# Altium PCB ArduinoMainBoard.PcbDoc
Units mil, origin at the board's own origin, x right, y up, seen from the top; angles counter-clockwise.
Board outline 4480 x 3980 mil, 2 copper layers (Top Layer, Bottom Layer); 122 components, 77 nets, 432 pads, 53 vias.
Unrouted connection lines stored in the file: 1.
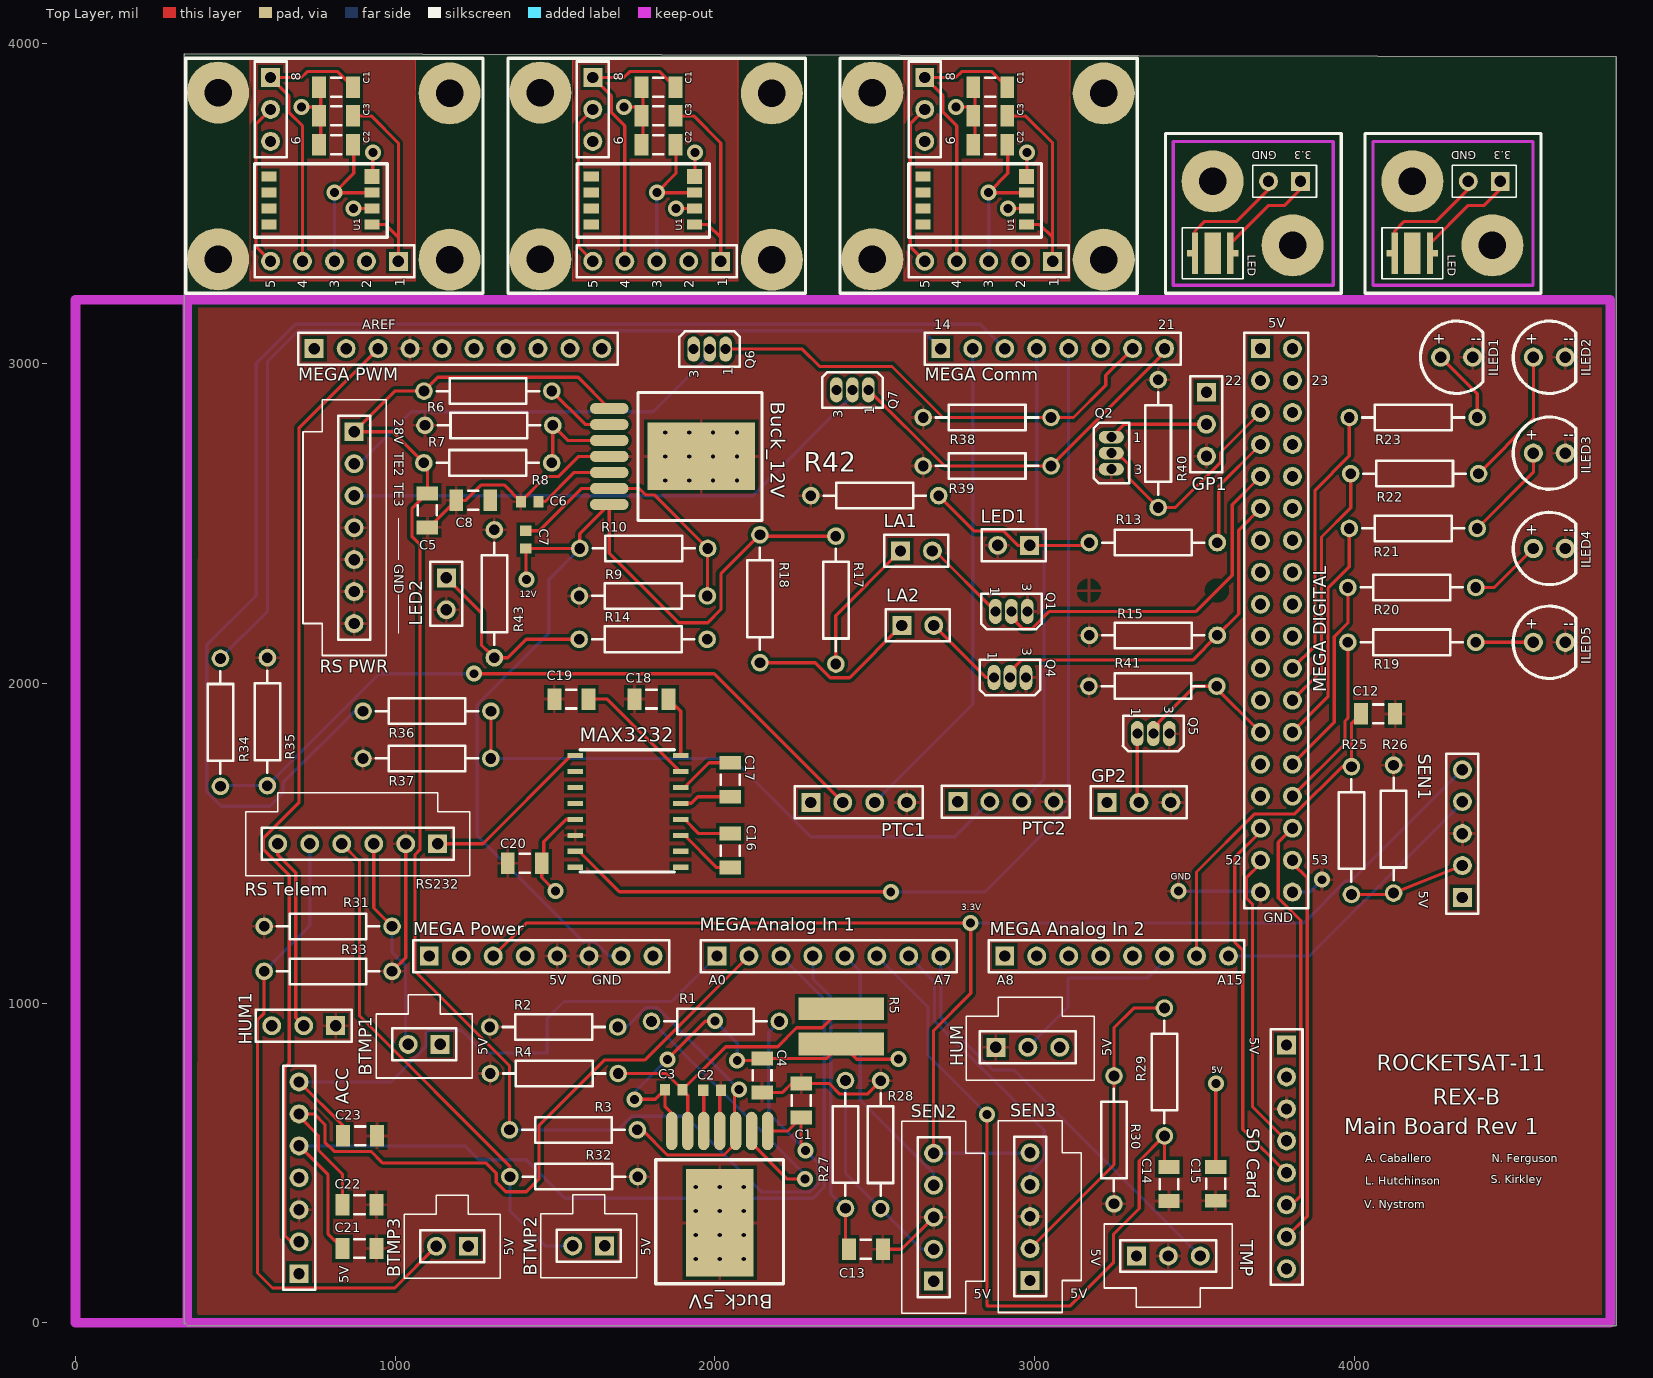
[diagram p0: Top Layer view]
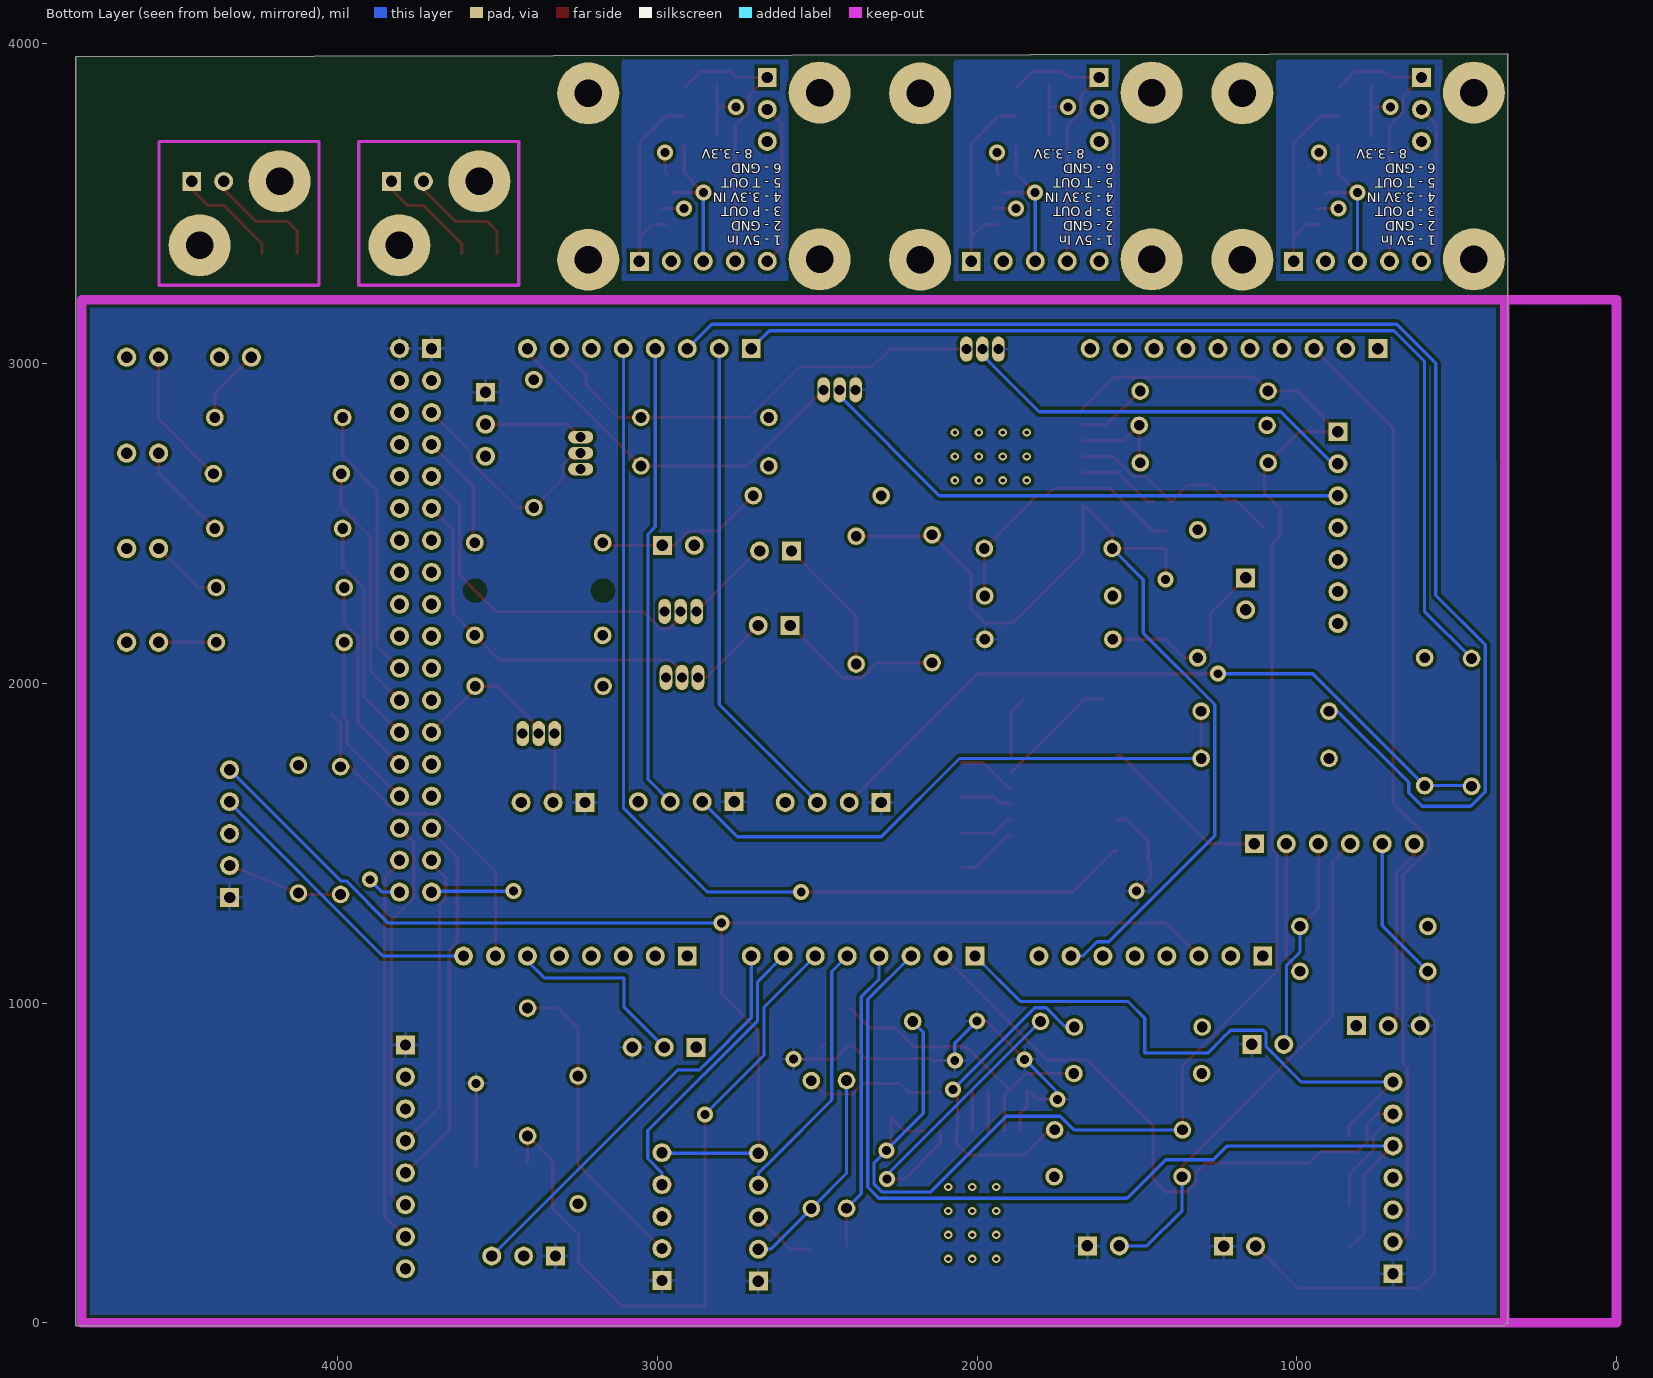
[diagram p1: Bottom Layer view, seen from below]

## Layer stack, top to bottom
Top Solder: solder mask 0.4, Solder Resist, Dk 3.5
Top Layer: signal copper 1.4
Dielectric1: dielectric 12.6, FR-4, Dk 4.8
Bottom Layer: signal copper 1.4
Bottom Solder: solder mask 0.4, Solder Resist, Dk 3.5

## Board outline
340,3970 340,0 350,-10 4820,-10 4820,3960

## Design rules (kind name [scope] priority, off if disabled: settings)
Clearance [All] p1: gap=10
ComponentClearance [All] p1: gap=5 collisioncheckmode=3 verticalgap=10 showdistances=FALSE
PolygonConnect [All] p1: connectstyle=Relief reliefconductorwidth=10 reliefentries=4 polygonreliefangle="90 Angle" airgapwidth=10
RoutingVias [All] p1: holewidth=28 width=50 viastyle="Through Hole" minholewidth=28 minwidth=50 maxholewidth=28 maxwidth=50
SilkToSilkClearance [All] p1: silktosilkclearance=5
SilkToSolderMaskClearance SilkscreenOverComponentPads [IsPad] p1: minsilkscreentomaskgap=10 clearancetoexposedcopper=TRUE
SolderMaskExpansion [All] p1: expansion=4
Width [All] p1: maxlimit=10 minlimit=10 preferedwidth=10
27 further rules are at their usual default settings.

## Classes and differential pairs
component class Telemetry_AnalogSensors_PTC08_Shifter: BTMP1 BTMP2 BTMP3 C16 C17 C18 C19 C20 HUM1 MAX3232 "MEGA Comm" PTC1 PTC2 R31 R32 R33 R34 R35 R36 R37 "RS Telem"
component class Analog_Input: ACC C12 C13 C14 C15 C21 C22 C23 HUM "MEGA Analog In 1" "MEGA Analog In 2" "MEGA PWM" R25 R26 R27 R28 R29 R30 SEN1 SEN2 SEN3 TMP
component class GoPro_Actuator_LED: GP1 GP2 LA1 LA2 LED1 LED2 Q1 Q2 Q4 Q5 R13 R14 R15 R17 R18 R40 R41 R42 R43
component class Power_TimerEvents: Buck_5V Buck_12V C1 C2 C3 C4 C5 C6 C7 C8 Q6 Q7 R1 R2 R3 R4 R5 R6 R7 R8 R9 R10 R38 R39 "RS PWR"
component class ArduinoPWR-DIG_SDCard: ILED1 ILED2 ILED3 ILED4 ILED5 "MEGA DIGITAL" "MEGA Power" R19 R20 R21 R22 R23 "SD Card"

## Components (designator, comment, footprint, x,y, rotation, side; value= is the part's Value field where it differs from the comment)
5 "Pressure" HDR1X5 3056.23,3320 r180 top (schematic designator P)
5 "Pressure" HDR1X5 2018.15,3320 r180 top (schematic designator P)
5 "Pressure" HDR1X5 1010,3320 r180 top (schematic designator P)
ACC "Accelerometer" HDR1X7 699.27,153.11 r90 top
BTMP1 "Boom Temp" HDR1X2 1140.49,870.64 r180 top
BTMP2 "Boom Temp" HDR1X2 1654.92,240.34 r180 top
BTMP3 "Boom Temp" HDR1X2 1228.86,239.22 r180 top
Buck_5V "LMZ14203HTZ" LMZ1420 2164.94,599.77 r180 top
Buck_12V "LMZ14201H" LMZ1420 1669.49,2859.75 r270 top
C1 "Cap Semi" C1206 2861.23,3865 r180 top
C1 "Cap Semi" C1206 1823.15,3865 r180 top
C1 "Cap Semi" C1206 815,3865 r180 top
C1 "Cap Semi" C1206 2269.58,695.27 r90 top
C2 "Cap Semi" C1206 2861.23,3685 r0 top
C2 "Cap Semi" C1206 1823.15,3685 r0 top
C2 "Cap Semi" C1206 815,3685 r0 top
C2 "Cap Semi" 1608[0603] 1990.99,726.97 r0 top
C3 "Cap Semi" C1206 2861.23,3775 r180 top
C3 "Cap Semi" C1206 1823.15,3775 r180 top
C3 "Cap Semi" C1206 815,3775 r180 top
C3 "Cap Semi" 1608[0603] 1871.06,728.49 r180 top
C4 "Cap Semi" C1206 2147.42,773.56 r270 top
C5 "Cap Semi" C1206 1100.75,2540.97 r270 top
C6 "Cap Semi" 1608[0603] 1420.37,2568.37 r180 top
C7 "Cap Semi" 1608[0603] 1408.62,2449.65 r270 top
C8 "Cap Semi" C1206 1244.25,2572.28 r180 top
C12 "Cap Semi" C1206 4074.37,1904.28 r180 top
C13 "Cap Semi" C1206 2472.08,229.77 r180 top
C14 "Cap Semi" C1206 3420.21,433.66 r90 top
C15 "Cap Semi" C1206 3566.03,434.5 r270 top
C16 "Cap Semi" C1206 2047.95,1476.81 r270 top
C17 "Cap Semi" C1206 2047.95,1698.35 r270 top
C18 "Cap Semi" C1206 1801.6,1950.82 r0 top
C19 "Cap Semi" C1206 1550.96,1950.82 r0 top
C20 "Cap Semi" C1206 1405.12,1436.86 r0 top
C21 "Cap" C1206 888.21,232.12 r180 top
C22 "Cap" C1206 888.21,368.74 r180 top
C23 "Cap" C1206 890,584.28 r180 top
GP1 "GoPro 1" HDR1X3 3537.5,2910.44 r270 top
GP2 "GoPro 2" HDR1X3 3226.24,1627.43 r0 top
HUM "Humidity" HDR1X3 2878.77,861.32 r0 top
HUM1 "Humidity" HDR1X3 813.76,929.25 r180 top
ILED1 "LED" LED#1 4270,3020 r0 top
ILED2 "LED" LED#1 4560,3020 r0 top
ILED3 "LED" LED#1 4560,2720 r0 top
ILED4 "LED" LED#1 4560,2421.79 r0 top
ILED5 "LED" LED#1 4560,2128.39 r0 top
LA1 "Actuator (F)" HDR1X2 2580.26,2414.03 r0 top
LA2 "Actuator (R)" HDR1X2 2584.65,2181.13 r0 top
LED "LED" LED#2 4181.6,3345 r90 top (schematic designator P10)
LED "LED" LED#2 3556.73,3345 r90 top (schematic designator P10)
LED1 "Front LED" HDR1X2 2984.55,2431.47 r180 top
LED2 "Rear LED" HDR1X2 1160,2330 r270 top
MAX3232 "Component_1" rs232 1662.98,1774.62 r0 top
"MEGA Analog In 1" "MEGA Analog In 1" HDR1X8 2006.42,1147.02 r0 top
"MEGA Analog In 2" "MEGA Analog Input 2" HDR1X8 2906.42,1147.02 r0 top
"MEGA Comm" "MEGA Communication" HDR1X8 2706.42,3047.02 r0 top (schematic designator M5)
"MEGA DIGITAL" "MEGA Digital" HDR2X18 3706.42,3047.02 r270 top (schematic designator M4)
"MEGA Power" "MEGA_Power" HDR1X8 1106.42,1147.02 r0 top (schematic designator M1)
"MEGA PWM" "MEGA PWN Output" HDR1X10 746.42,3047.02 r0 top (schematic designator M6)
P9 "Header" HDR1X2 4456.6,3570 r180 top
P9 "Header" HDR1X2 3831.73,3570 r180 top
PTC1 "PTC08 (R)" HDR1X4 2300,1627.43 r0 top
PTC2 "PTC08 (F)" HDR1X4 2760,1630 r0 top
Q1 "MOSFET-N" E3 2927.42,2224.93 r90 top
Q2 "MOSFET-N" E3 3240,2720 r0 top
Q4 "MOSFET-N" E3 2923.02,2018.39 r90 top
Q5 "MOSFET-N" E3 3371.26,1842.75 r90 top
Q6 "MOSFET-N" E3 1983.5,3045.39 r270 top
Q7 "MOSFET-N" E3 2430,2917.95 r270 top
R1 "Res2" AXIAL-0.4 2001.67,942.52 r0 top
R2 "Res2" AXIAL-0.4 1496.11,925.03 r0 top
R3 "Res2" AXIAL-0.4 1557.46,603.33 r180 top
R4 "Res2" AXIAL-0.4 1497.48,779.62 r0 top
R5 "smd_res1" smd_res1 2395.32,982.31 r270 top
R6 "Res2" AXIAL-0.4 1289.88,2914.14 r180 top
R7 "Res2" AXIAL-0.4 1292.9,2806.79 r0 top
R8 "Res2" AXIAL-0.4 1289.56,2689.81 r180 top
R9 "smd_res1" AXIAL-0.4 1776.08,2273.41 r180 top
R10 "smd_res1" AXIAL-0.4 1777.47,2421.79 r180 top
R13 "Res2" AXIAL-0.4 3371.26,2440 r0 top
R14 "Res2" AXIAL-0.4 1775.56,2137.8 r0 top
R15 "Res2" AXIAL-0.4 3371.26,2150 r0 top
R17 "Res2" AXIAL-0.4 2378.11,2260.23 r270 top
R18 "Res2" AXIAL-0.4 2140.81,2264.62 r270 top
R19 "Res2" AXIAL-0.4 4179.83,2128.39 r180 top
R20 "Res2" AXIAL-0.4 4179.83,2299.78 r180 top
R21 "Res2" AXIAL-0.4 4184.23,2484.34 r180 top
R22 "Res2" AXIAL-0.4 4188.62,2655.72 r180 top
R23 "Res2" AXIAL-0.4 4184.23,2831.5 r180 top
R25 "Res2" AXIAL-0.4 3990.87,1539.54 r90 top
R26 "Res2" AXIAL-0.4 4122.71,1543.93 r270 top
R27 "Res2" AXIAL-0.4 2408.36,557.69 r90 top
R28 "Res2" AXIAL-0.4 2518.3,557.08 r90 top
R29 "Res2" AXIAL-0.4 3405.99,784.28 r270 top
R30 "Res2" AXIAL-0.4 3248.23,571.96 r90 top
R31 "Res2" AXIAL-0.4 790,1240 r0 top
R32 "Res2" AXIAL-0.4 1558.74,456.94 r180 top
R33 "Res2" AXIAL-0.4 790,1099.06 r180 top
R34 "Res2" AXIAL-0.4 453.35,1877.91 r90 top
R35 "Res2" AXIAL-0.4 600,1880 r90 top
R36 "Res2" AXIAL-0.4 1099.33,1913.06 r180 top
R37 "Res2" AXIAL-0.4 1099.2,1764.99 r180 top
R38 "Res2" AXIAL-0.4 2851.48,2831.5 r0 top
R39 "Res2" AXIAL-0.4 2851.48,2680 r0 top
R40 "Res2" AXIAL-0.4 3386.57,2750 r270 top
R41 "Res2" AXIAL-0.4 3370,1991.09 r0 top
R42 "Res2" AXIAL-0.4 2500,2587.02 r0 top
R43 "Res2" AXIAL-0.4 1310,2280 r90 top
"RS PWR" "RS Power" HDR1X7 871.42,2787.02 r270 top (schematic designator RS1)
"RS Telem" "RockSat Telemetry" HDR1X6 1132.74,1498.09 r180 top
"SD Card" "SD_Card" HDR1X8 3787.9,868.74 r270 top (schematic designator SD)
SEN1 "Temp/Press" HDR1X5 4338.03,1330 r90 top
SEN2 "Temp/Press" HDR1X5 2684.01,130.26 r90 top
SEN3 "Temp/Press" HDR1X5 2985.79,132.12 r90 top
T "Temperature" HDR1X3 2656.23,3895 r270 top
T "Temperature" HDR1X3 1618.15,3895 r270 top
T "Temperature" HDR1X3 610,3895 r270 top
TMP "Amb Temp" HDR1X3 3318.38,208.77 r0 top
U1 "Pressure" KP-234 2651.23,3435 r0 top
U1 "Pressure" KP-234 1613.15,3435 r0 top
U1 "Pressure" KP-234 605,3435 r0 top

## Footprints (in the part's own frame and the unit in brackets; to place one, negate y for a bottom-side part, rotate by r counter-clockwise, add the part's x,y. Pads: shape width x height; smd on the part's side, far side on the other; paste and mask are expansions set on the pad)
1608[0603] [mm] "Chip Capacitor, Body 1.6x0.8mm, IPC High Density"
  rect 0.8x0.9 smd: 1(-0.7,0) 2(0.7,0)
  body extent -0.87,-0.48 0.87,0.48, height 1.3
AXIAL-0.4 [mm] "Axial Device, Thru-Hole; 2 Leads; 0.4 in Pin Spacing"
  round 1.4 hole 0.85: 1(-5.08,0) 2(5.08,0)
  silkscreen extent -4.06,-1.02 4.06,1.02
C1206 [mm] "Chip Capacitor, Body 3.2x1.6mm, IPC High Density"
  rect 1.1x1.7 smd: 1(-1.35,0) 2(1.35,0)
  silkscreen extent -0.4,-0.75 0.4,0.75, body extent -1.7,-0.9 1.7,0.9, height 1.3
E3 [mm] "TO, Flat Index; 3 In-Line, Axial Leads; Body Dia. 4.6mm; Lead Dia. 0.5 mm (max)"
  oval 2x1 hole 0.8: 1(0,1.27) 2(0,0) 3(0,-1.27)
  silkscreen extent -1.41,-2.41 1.41,2.41
HDR1X2 [mm] "Connector; Header; 2 Position"
  rect 1.5x1.5 hole 0.9: 1(0,0)
  round 1.5 hole 0.9: 2(2.54,0)
  silkscreen extent -1.27,-1.27 3.81,1.27
HDR1X3 [mm] "Connector; Header; 3 Position"
  rect 1.5x1.5 hole 0.9: 1(0,0)
  round 1.5 hole 0.9: 2(2.54,0) 3(5.08,0)
  silkscreen extent -1.27,-1.27 6.35,1.27
HDR1X4 [mm] "Connector; Header; 4 Position"
  rect 1.5x1.5 hole 0.9: 1(0,0)
  round 1.5 hole 0.9: 2(2.54,0) 3(5.08,0) 4(7.62,0)
  silkscreen extent -1.27,-1.27 8.89,1.27
HDR1X5 [mm] "Connector; Header; 5 Position"
  rect 1.5x1.5 hole 0.9: 1(0,0)
  round 1.5 hole 0.9: 2(2.54,0) 3(5.08,0) 4(7.62,0) 5(10.16,0)
  silkscreen extent -1.27,-1.27 11.43,1.27
HDR1X6 [mm] "Connector; Header; 6 Position"
  rect 1.5x1.5 hole 0.9: 1(0,0)
  round 1.5 hole 0.9: 2(2.54,0) 3(5.08,0) 4(7.62,0) 5(10.16,0) 6(12.7,0)
  silkscreen extent -1.27,-1.27 13.97,1.27
HDR1X7 [mm] "Connector; Header; 7 Position"
  rect 1.5x1.5 hole 0.9: 1(0,0)
  round 1.5 hole 0.9: 2(2.54,0) 3(5.08,0) 4(7.62,0) 5(10.16,0) 6(12.7,0) 7(15.24,0)
  silkscreen extent -1.27,-1.27 16.51,1.27
HDR1X8 [mm] "Connector; Header; 8 Position"
  rect 1.5x1.5 hole 0.9: 1(0,0)
  round 1.5 hole 0.9: 2(2.54,0) 3(5.08,0) 4(7.62,0) 5(10.16,0) 6(12.7,0) 7(15.24,0) 8(17.78,0)
  silkscreen extent -1.27,-1.27 19.05,1.27
HDR1X10 [mm] "Connector; Header; 10 Position"
  rect 1.5x1.5 hole 0.9: 1(0,0)
  round 1.5 hole 0.9: 2(2.54,0) 3(5.08,0) 4(7.62,0) 5(10.16,0) 6(12.7,0) 7(15.24,0) 8(17.78,0) 9(20.32,0) 10(22.86,0)
  silkscreen extent -1.27,-1.27 24.13,1.27
HDR2X18 [mm] "Connector; Header; 18x2 Position"
  rect 1.5x1.5 hole 0.9: 1(0,0)
  round 1.5 hole 0.9: 2(0,2.54) 3(2.54,0) 4(2.54,2.54) 5(5.08,0) 6(5.08,2.54) 7(7.62,0) 8(7.62,2.54) 9(10.16,0) 10(10.16,2.54) 11(12.7,0) 12(12.7,2.54) 13(15.24,0) 14(15.24,2.54) 15(17.78,0) 16(17.78,2.54) 17(20.32,0) 18(20.32,2.54) 19(22.86,0) 20(22.86,2.54) 21(25.4,0) 22(25.4,2.54) 23(27.94,0) 24(27.94,2.54) 25(30.48,0) 26(30.48,2.54) 27(33.02,0) 28(33.02,2.54) 29(35.56,0) 30(35.56,2.54) 31(38.1,0) 32(38.1,2.54) 33(40.64,0) 34(40.64,2.54) 35(43.18,0) 36(43.18,2.54)
  silkscreen extent -1.27,-1.27 44.45,3.81
KP-234 [mm]
  rect 1.2x0.8 smd: 1(0,3.81) 2(0,2.54) 3(0,1.27) 4(0,0) 5(8.2,0) 6(8.2,1.27) 7(8.2,2.54)
  rect 1.2x1.2 smd: 8(8.2,3.81)
  silkscreen extent -1.14,-1.02 9.4,4.83
LED#1 [mil]
  round 60 hole 35.43: 0(0,0) 1(100,0)
  silkscreen extent -63,-113 133,113, body extent -68,-120 168,116, height 398
LED#2 [mil]
  rect 19.68x15.75 smd: 1(0,72.83) 2(0,-72.83)
  rect 129.92x19.68 smd: 1(0,55.12) 2(0,-55.12)
  rect 129.92x51.18 smd: ""(0,0)
  silkscreen extent -80,-95 80,95
LMZ1420 [mm]
  oval 0.89x3.06 smd mask+0.1: 1(0,0) 2(1.27,0) 3(2.54,0) 4(3.81,0) 5(5.08,0) 6(6.35,0) 7(7.62,0)
  rect 5.35x8.54 smd mask+0.1: 8(3.81,7.305)
  silkscreen extent -1.27,2.29 8.89,12.14
rs232 [mil]
  rect 47.5x16 smd: 1(-100,0) 2(-100,-50) 3(-100,-100) 4(-100,-150) 5(-100,-200) 6(-100,-250) 7(-100,-300) 8(-100,-350) 9(230,-350) 10(230,-300) 11(230,-250) 12(230,-200) 13(230,-150) 14(230,-100) 15(230,-50) 16(230,0)
  silkscreen extent -85,-365 210,18
smd_res1 [mm]
  rect 1.8x6.8 smd mask+0.102: 1(0,0) 2(2.8,0)

## Part data
5 5 5: library part "Header 5H", "Header, 5-Pin, Right Angle"
ACC "RS PWR": library part "Header 7", "Header, 7-Pin"
BTMP1 BTMP2 BTMP3 LA1 LA2 LED1 LED2 P9 P9: library part "Header 2", "Header, 2-Pin"
Buck_5V Buck_12V LED LED "MEGA Comm" "MEGA DIGITAL" "MEGA Power" "RS Telem" "SD Card" U1 U1 U1: library part Component_1
C1 C1 C1 C1 C2 C2 C2 C2 C3 C3 C3 C3 C4 C5 C6 C7 C8 C12 C13 C14 C15 C16 C17 C18 C19 C20: "Capacitor (Semiconductor SIM Model)"
C21 C22 C23: "Capacitor"
GP1 GP2 HUM HUM1 T T T TMP: library part "Header 3", "Header, 3-Pin"
"MEGA Analog In 1" "MEGA Analog In 2": library part "Header 8", "Header, 8-Pin"
"MEGA PWM": library part "Header 10", "Header, 10-Pin"
PTC1 PTC2: library part "Header 4", "Header, 4-Pin"
Q1 Q2 Q4 Q5 Q6 Q7: "N-Channel MOSFET"
R1 R2 R3 R4 R6 R7 R8 R13 R14 R15 R17 R18 R19 R20 R21 R22 R23 R25 R26 R27 R28 R29 R30 R31 R32 R33 R34 R35 R36 R37 R38 R39 R40 R41 R42 R43: "Resistor"
SEN1 SEN2 SEN3: library part "Header 5", "Header, 5-Pin"

## Free pads (board coordinates)
  round 194 hole 86: 0(446,3326) 0(446,3847.94) 0(1170,3325) 0(1170,3845) 0(1454.15,3326) 0(1454.15,3847.94) 0(2178.15,3325) 0(2178.15,3845) 0(2492.23,3326) 0(2492.23,3847.94) 0(3216.23,3325) 0(3216.23,3845)
  round 194 hole 86 unplated: 0(3556.73,3570) 0(3806.73,3370) 0(4181.6,3570) 0(4431.6,3370)

## Via types
v1: diameter 50, hole 28, Top Layer to Bottom Layer, 29 vias
v2: diameter 25.98, hole 12.99, Top Layer to Bottom Layer, 24 vias

## Nets (pads, with @x,y where several pads share a name; then routed paths per layer and width w, separated by ;. In a path a pad name is that pad's centre, name@x,y a point inside that pad or via, vN(x,y) a via of type N, cw(c..) or ccw(c..) an arc to the next point about the centre after c; other vN are vias at no path point)
3.3V: "MEGA Power.3" SEN1.5 SEN2.5 SEN3.5 | length 4355.5
  Top Layer w10: 1306.42,1147.02 1409.4,1250 v1(2800,1250) 2800,1030 2684.01,914.01 SEN2.5
  Bottom Layer w10: SEN2.5 SEN3.5@2983.93,530.26 ; v1(2800,1250) 3841.15,1250 3973.25,1382.1 3990.13,1382.1 SEN1.5 ; SEN1.5@4324.85,1733.7 4334.34,1733.7 SEN1.5@4338.03,1737.39
5V: "MEGA DIGITAL.1" "MEGA DIGITAL.2" "SD Card.1" ACC.1 BTMP1.1 BTMP2.1 BTMP3.1 Buck_5V.7 C3.2@1843.5,728.49 C4.1 C15.1 C20.2 GP1.1 GP2.1 HUM1.3 HUM.3 MAX3232.5 PTC1.1 PTC2.1 Q6.3 Q7.3 R5.2 R14.2 SEN1.1 SEN2.1 SEN3.1 TMP.1 | length 1877
  Top Layer w10: v1(1500.86,1349.94) 1458.27,1392.53 C20.2 1464.54,1443.13 1464.54,1504.55 1534.61,1574.62 MAX3232.5@1560.02,1574.62 ; v1(1748.82,698.89) 1813.9,698.89 1843.5,728.49 1843.5,677.04 1864.94,655.6 Buck_5V.7 ; v1(1851.23,824.01) 1970.34,943.13 v1(2000.77,943.13) ; v1(2069.79,820.34) C4.1@2141.05,820.34 ; C4.1 2349.95,826.71 R5.2 2443.13,824.26 v1(2574.25,824.26) ; R5.2@2475.58,872.08 R5.2@2488.37,859.29 ; C15.1@3566.82,488.45 v1(3566.82,748.99)
  Bottom Layer w10: v1(1748.82,698.89) 1748.82,721.61 v1(1851.23,824.01) ; v1(2000.77,943.13) 2069.79,874.12 v1(2069.79,820.34)
12V: "MEGA Power.7" Buck_12V.7 C7.2 C8.1 R10.2 R17.1 R18.1 | length 3210.5
  Top Layer w10: v1@1408.62,2325.7 C7.2 1577.17,2422.1 1577.17,2467.43 Buck_12V.7 1669.49,2406.51 1886.26,2189.74 1977.52,2189.74 2018.63,2230.85 2018.63,2342.44 R18.1 2145.21,2460.23 R17.1
  Bottom Layer w10: R10.2 1480,2324.32 1480,2157.15 1256.64,1933.79 1256.64,1523.36 1588.45,1191.55 1624.86,1191.55 1669.39,1147.02 1706.42,1147.02
  other v1: 1410,2324.32
A0: "MEGA Analog In 1.1" ACC.7 C23.2 | length 1847.2
  Top Layer w10: ACC.7 836.85,615.53 C23.2
  Bottom Layer w10: ACC.7 985.94,753.11 1095.96,863.14 1095.96,906.38 1104.75,915.16 1206.63,915.16 1226.1,895.69 ; 1226.1,897.86 1226.1,895.69 ; 2006.42,1147.02 1864.48,1005.08 1715.97,1005.08 1715.73,1004.84 1527.8,1004.84 1475.4,952.45 1475.4,843.25 1278.54,843.25 1226.1,895.69
A1: "MEGA Analog In 1.2" ACC.6 C22.2 | length 2300.5
  Top Layer w10: C22.2 835.06,464.94 760,540 760,584.8 699.27,645.53 ACC.6 746.89,653.11 780,620 780,564.8 808.98,535.81 924.19,535.81 960,500 1283.59,500 1316.18,467.42 1316.18,439.32 1345.49,410 1410,410 1450,450 1450,617.25 1654.92,822.18 1781.58,822.18 2106.42,1147.02
A2: "MEGA Analog In 1.3" ACC.5 C21.2 | length 2881.4
  Top Layer w10: ACC.5 790,462.38 790,277.19 C21.2
  Bottom Layer w10: ACC.5 1217.99,553.11 1261.11,510 1410,510 1530.69,389.31 2307.06,389.31 2342.21,424.45 2342.21,1011.23 2206.42,1147.02
A13: "MEGA Analog In 2.6" HUM.2 | length 609
  Bottom Layer w10: HUM.2 3104.05,986.59 3104.05,1078.75 3353.57,1078.75 3406.42,1131.6 3406.42,1147.02
AREF: "MEGA PWM.3" ACC.2 | length 3014.4
  Top Layer w10: ACC.2 674.43,253.11 654.75,272.8 654.75,797.64 668.74,811.63 668.74,1399.12 588.21,1479.65 588.21,1516.53 699.27,1627.6 699.27,2799.88 946.42,3047.02
GND: "MEGA DIGITAL.35" "MEGA DIGITAL.36" "MEGA Power.5" "MEGA Power.6" "MEGA PWM.4" "RS PWR.4" "RS PWR.5" "RS PWR.6" "RS PWR.7" "RS Telem.2" "SD Card.3" ACC.3 Buck_5V.4 Buck_5V.8 Buck_12V.4 Buck_12V.8 C1.2@2269.58,748.42 C2.2@2018.55,726.97 C4.2 C5.2 C6.2 C8.2 C12.1 C13.1 C14.1 C15.2 C18.1 C19.1 C20.1 C21.1 C22.1 C23.1 GP1.3 GP2.3 HUM1.1 HUM.1 ILED1.1 ILED2.1 ILED3.1 ILED4.1 ILED5.1 LED1.2 LED2.2 MAX3232.6 PTC1.4 PTC2.4 Q1.3 Q2.3 Q4.3 Q5.3 R2.1 R4.1 R7.1 R9.2 R15.1 R26.1 R28.2 R30.1 R31.1 R32.1 R33.1 R35.2 R37.2 R38.1 R39.1 R40.1 R41.1 R42.1 R43.2 SEN1.3 SEN2.3 SEN3.3 TMP.2 | length 2224.4
  Top Layer w10: R33.1 1032.74,1141.8 1032.74,1498.09 ; C5.2 1106.64,2487.82 C8.2 1221.07,2572.28 1269.53,2620.75 1340.43,2620.75 C6.2 1471.69,2647.25 1511.54,2647.25 1574.03,2709.75 Buck_12V.4 ; Buck_5V.4 C2.2@2014.94,723.36 ; C4.2 2211.66,720.41 2239.67,748.42 2269.58,748.42 2357.43,748.42 2390.73,715.13 2476.35,715.13 R28.2 ; C13.1 2583.52,229.77 SEN2.3
  Bottom Layer w10: v1(3450,1349.94) 3703.5,1349.94 3706.42,1347.02 ; 3806.42,1347.02 3860.06,1347.02 v1(3898.7,1385.66)
  other v2: 1939.94,199.77 2014.94,199.77 2089.94,199.77 1939.94,274.77 2014.94,274.77 2089.94,274.77 1939.94,349.77 2014.94,349.77 2089.94,349.77 1939.94,424.77 2014.94,424.77 2089.94,424.77 1844.49,2634.75 1919.49,2634.75 1994.49,2634.75 2069.49,2634.75 1844.49,2709.75 1919.49,2709.75 1994.49,2709.75 2069.49,2709.75 1844.49,2784.75 1919.49,2784.75 1994.49,2784.75 2069.49,2784.75
GPRO_TRIG1: "MEGA DIGITAL.5" Q2.2 R40.2 | length 703.4
  Top Layer w10: Q2.2 3255.31,2704.68 3274.05,2704.68 3294.37,2684.37 3294.37,2642.2 R40.2 3440.04,2550 3582.03,2691.99 3582.03,2722.02 3581.42,2722.02 3706.42,2847.02
GPRO_TRIG2: "MEGA DIGITAL.25" Q5.2 R41.2 | length 467.3
  Top Layer w10: Q5.2 3386.57,1858.07 3386.57,1876.81 3500.86,1991.09 3562.35,1991.09 3706.42,1847.02
LA_TRIG1: "MEGA DIGITAL.9" Q1.2 | length 1139.1
  Top Layer w10: Q1.2 2942.73,2209.62 2942.73,2190.88 2963.05,2170.56 2991.79,2170.56 3046.16,2224.93 3504.93,2224.93 3618.21,2338.21 3618.21,2558.81 3706.42,2647.02
LA_TRIG2: "MEGA DIGITAL.11" Q4.2 R15.2 | length 1166.7
  Top Layer w10: Q4.2 2938.34,2033.71 2938.34,2052.44 2958.66,2072.76 3494.02,2072.76 R15.2 3638.21,2216.95 3638.21,2478.81 3706.42,2547.02
LED_TRIG: "MEGA DIGITAL.7" R13.2 | length 361.2
  Top Layer w10: R13.2@3575.65,2440 3575.65,2616.26 3706.42,2747.02
NetBTMP1_2: "RS Telem.3" BTMP1.2 R31.2 | length 672.1
  Top Layer w10: 932.74,1498.09 932.74,1297.26 R31.2
  Bottom Layer w10: R31.2 990,1159.25 1032.56,1116.69 1032.56,878.57 BTMP1.2
NetBTMP2_2: "RS Telem.4" BTMP2.2 R32.2 | length 1607.3
  Top Layer w10: 832.74,1498.09 888.21,1442.62 888.21,959.94 1358.74,489.42 R32.2
  Bottom Layer w10: R32.2 1358.74,350.49 1468.89,240.34 BTMP2.2
NetBTMP3_2: "RS Telem.5" BTMP3.2 R33.2 | length 2043.5
  Top Layer w10: R33.2 590,968.47 569.23,947.7 569.23,155.51 616.16,108.58 998.22,108.58 BTMP3.2
  Bottom Layer w10: R33.2 732.74,1241.8 732.74,1498.09
NetBuck_5V_1: "RS PWR.1" Buck_5V.1 Buck_12V.1 C1.1@2269.58,642.12 C5.1 R1.2 R3.2 R6.2 R8.2 | length 5290.5
  Top Layer w10: R8.2 992.35,2787.02 871.42,2787.02 998.54,2914.14 R6.2 1132.85,2957.12 1572.12,2957.12 Buck_12V.1 ; R8.2@1100.75,2678.62 C5.1 1052.29,2545.66 1052.29,2459.96 1077.27,2434.98 1077.27,1479.65 1061.89,1464.27 1061.89,1099.06 1357.46,803.49 R3.2 ; Buck_5V.1 2227.23,599.77 2269.58,642.12 v1@2269.58,553.22
  Bottom Layer w10: R3.2 1697.28,603.33 1739.84,645.89 1908.4,645.89 2144.99,409.31 2298.78,409.31 2322.21,432.74 2322.21,500.6 v1(2283.61,539.19) 2168.06,654.74 2168.06,908.92 R1.2
NetBuck_5V_2: Buck_5V.2 R1.1 | length 931.9
  Top Layer w10: Buck_5V.2 2114.94,561.06 2226.69,449.31 v1(2282.21,449.31)
  Bottom Layer w10: R1.1 v1@2282.21,461.98
NetBuck_5V_3: Buck_5V.3 R2.2 R3.1 | length 1036.3
  Top Layer w10: R2.2@1696.11,924.15 R2.2 ; R3.1 1772.67,603.33 1851.47,524.53 2028.41,524.53 2064.94,561.06 Buck_5V.3 ; Buck_5V.3@2061.53,603.17 2061.53,716.79 v1(2074.81,730.07)
  Bottom Layer w10: R2.2 1723.99,925.03 1784.04,985.08 1819.29,985.08 v1@2074.56,729.82
NetBuck_5V_5: Buck_5V.5 C2.1@1963.43,726.97 | length 125.7
  Top Layer w10: Buck_5V.5 C2.1@1964.94,725.46
NetBuck_5V_6: Buck_5V.6 C3.1@1898.61,728.49 R4.2 R5.1 | length 959.6
  Top Layer w10: R4.2 1847.48,779.62 C3.1@1898.61,728.49 ; Buck_5V.6 1914.94,712.17 C3.1@1898.61,728.49 ; R5.1 2335.51,922.51 2255.24,922.51 2196.1,863.36 2033.49,863.36 C3.1@1898.61,728.49
NetBuck_12V_2: Buck_12V.2 R6.1 | length 222.9
  Top Layer w10: R6.1 1594.27,2809.75 Buck_12V.2
NetBuck_12V_3: Buck_12V.3 R7.2 R8.1 | length 309.7
  Top Layer w10: R8.1@1492.9,2693.16 R7.2 1539.95,2759.75 Buck_12V.3
NetBuck_12V_5: Buck_12V.5 C6.1 | length 259.4
  Top Layer w10: C6.1 1468.37,2568.37 1559.75,2659.75 Buck_12V.5
NetBuck_12V_6: Buck_12V.6 C7.1 R9.1 R10.1 | length 848.6
  Top Layer w10: C7.1 1450.33,2477.21 1582.86,2609.75 Buck_12V.6 1762.45,2609.75 1782.76,2589.43 1809.83,2589.43 R10.1 ; R9.1@1976.49,2273.82 R10.1@1976.49,2420.81
NetC12_2: "MEGA Analog In 2.7" C12.2 R25.2 | length 1061.2
  Top Layer w10: 3506.42,1147.02 3506.42,1409.99 3687.98,1591.55 3813.92,1591.55 3961.91,1739.54 R25.2 3990.87,1873.93 C12.2
NetC13_2: "MEGA Analog In 1.4" C13.2 R27.1 | length 948.9
  Top Layer w10: C13.2@2408.36,240.34 R27.1
  Bottom Layer w10: 2306.42,1147.02 2306.42,1075.31 2362.21,1019.52 2362.21,403.83 R27.1
NetC14_2: "MEGA Analog In 1.6" C14.2 R29.2 | length 2234.7
  Top Layer w10: v1(2851.48,651.32) 2851.48,52.08 3110.49,52.08 3246.3,187.89 3246.3,276.09 3327.51,357.3 3327.51,505.8 R29.2 C14.2@3405.99,501.03
  Bottom Layer w10: 2506.42,1147.02 2666.42,987.02 2666.42,836.38 v1(2851.48,651.32)
NetC16_1: C16.1 MAX3232.12 | length 173.5
  Top Layer w10: MAX3232.12 1904.73,1574.62 1949.39,1529.96 C16.1
NetC16_2: C16.2 MAX3232.11 | length 196.8
  Top Layer w10: MAX3232.11 1904.73,1524.62 2005.68,1423.66 C16.2
NetC17_1: C17.1 MAX3232.14 | length 186.8
  Top Layer w10: MAX3232.14 1904.73,1674.62 1981.61,1751.5 C17.1
NetC17_2: C17.2 MAX3232.13 | length 163.5
  Top Layer w10: MAX3232.13 1926.22,1624.62 1946.8,1645.2 C17.2
NetC18_2: C18.2 MAX3232.16 | length 192
  Top Layer w10: C18.2 1892.98,1912.59 MAX3232.16
NetC19_2: C19.2 MAX3232.15 | length 382.6
  Top Layer w10: C19.2 1663.81,1950.82 1890.02,1724.62 MAX3232.15
NetGP1_2: GP1.2 Q2.1 | length 335.5
  Top Layer w10: Q2.1 3280.44,2810.44 GP1.2 GP1.2@3522.45,2825.48
NetGP2_2: GP2.2 Q5.1 | length 210.3
  Top Layer w10: GP2.2@3321.26,1632.41 Q5.1
NetHUM1_2: "RS Telem.6" HUM1.2 | length 602.4
  Top Layer w10: 632.74,1498.09 632.74,1463.4 688.74,1407.4 688.74,954.27 HUM1.2
NetILED1_0: ILED1.0 R23.1 | length 235.8
  Top Layer w10: ILED1.0 4384.23,2905.77 R23.1
NetILED2_0: ILED2.0 R22.1 | length 435.3
  Top Layer w10: R22.1 4560,2827.1 ILED2.0
NetILED3_0: ILED3.0 R21.1 | length 308.5
  Top Layer w10: R21.1 4560,2660.11 ILED3.0
NetILED4_0: ILED4.0 R20.1 | length 230.7
  Top Layer w10: R20.1 4437.98,2299.78 ILED4.0
NetILED5_0: ILED5.0 R19.1 | length 180.2
  Top Layer w10: R19.1 ILED5.0
NetLA1_1: LA1.1 R17.2 | length 437.5
  Top Layer w10: R17.2 2378.11,2211.89 LA1.1
NetLA1_2: LA1.2 Q1.1 | length 275.5
  Top Layer w10: LA1.2 2688.32,2414.03 Q1.1
NetLA2_1: LA2.1 R18.2 | length 531
  Top Layer w10: R18.2 2313.53,2064.62 2360.49,2017.67 2421.19,2017.67 LA2.1
NetLA2_2: LA2.2 Q4.1 | length 255.8
  Top Layer w10: LA2.2 2847.39,2018.39 Q4.1
NetLED1_1: LED1.1 R13.1 R42.2 | length 539.2
  Top Layer w10: R42.2 2811.03,2476 2902.99,2476 2947.52,2431.47 LED1.1 3162.73,2431.47 R13.1
NetLED2_1: LED2.1 R14.1 R43.1 | length 594.8
  Top Layer w10: LED2.1 1269.53,2220.47 1269.53,2120 1292.39,2097.15 R43.1@1310,2097.15 ; R43.1 1351.97,2080 1409.77,2137.8 R14.1
NetMAX3232_1: "RS Telem.1" MAX3232.1 | length 544.8
  Top Layer w10: 1132.74,1498.09 1274.7,1498.09 1551.23,1774.62 MAX3232.1
"NetMEGA Analog In 1_5": "MEGA Analog In 1.5" SEN2.4 | length 831.7
  Bottom Layer w10: 2406.42,1147.02 2454.71,1098.73 2454.71,696.59 2639.48,511.82 2684.01,467.29 SEN2.4
"NetMEGA Analog In 1_7": "MEGA Analog In 1.7" SEN3.4 | length 908.9
  Bottom Layer w10: 2606.42,1147.02 2686.42,1067.02 2686.42,945.12 3030.31,601.22 3030.31,513.68 2985.79,469.15 SEN3.4
"NetMEGA Analog In 1_8": "MEGA Analog In 1.8" TMP.3 | length 1314
  Bottom Layer w10: 2706.42,1147.02 2706.42,953.4 2843.03,816.79 2869.23,790.59 2936.56,790.59 TMP.3
"NetMEGA Analog In 2_8": "MEGA Analog In 2.8" SEN1.4 | length 941.1
  Bottom Layer w10: 3606.42,1147.02 3858.55,1147.02 4338.03,1626.51 SEN1.4@4338.03,1637.39
"NetMEGA Comm_1": "MEGA Comm.1" R34.2 | length 3159.4
  Bottom Layer w10: R34.2 600.96,2225.52 600.96,3008.14 695.94,3103.12 2650.32,3103.12 2706.42,3047.02
"NetMEGA Comm_2": "MEGA Comm.2" PTC1.3 | length 1546.5
  Bottom Layer w10: PTC1.3 2806.42,1933.85 2806.42,3047.02
"NetMEGA Comm_3": "MEGA Comm.3" R36.2 | length 4477.5
  Bottom Layer w10: R36.2 873.06,1913.06 650,1690 650,1657.26 608.09,1615.35 455.72,1615.35 410.79,1660.28 410.79,2120.46 565.18,2274.86 565.18,3000.65 687.65,3123.12 2830.32,3123.12 2906.42,3047.02
"NetMEGA Comm_4": "MEGA Comm.4" PTC2.3 | length 1455
  Bottom Layer w10: PTC2.3 3029.07,1699.07 3029.07,2467.21 3006.42,2489.87 3006.42,3047.02
"NetMEGA DIGITAL_22": "MEGA DIGITAL.22" R23.2 | length 858.1
  Top Layer w10: 3806.42,2047.02 3877.28,2117.88 3877.28,2604.56 3984.23,2711.52 R23.2
"NetMEGA DIGITAL_24": "MEGA DIGITAL.24" R22.2 | length 784.2
  Top Layer w10: 3806.42,1947.02 3897.28,2037.88 3897.28,2457.58 3988.62,2548.92 R22.2
"NetMEGA DIGITAL_26": "MEGA DIGITAL.26" R21.2 | length 711
  Top Layer w10: 3806.42,1847.02 3917.28,1957.88 3917.28,2297.4 3984.23,2364.36 R21.2
"NetMEGA DIGITAL_28": "MEGA DIGITAL.28" R20.2 | length 624.6
  Top Layer w10: 3806.42,1747.02 3937.28,1877.88 3937.28,2146.02 3979.83,2188.58 R20.2
"NetMEGA DIGITAL_30": "MEGA DIGITAL.30" R19.2 | length 553.2
  Top Layer w10: 3806.42,1647.02 3970.87,1811.48 3970.87,1882.21 3979.83,1891.18 R19.2
"NetMEGA DIGITAL_31": "MEGA DIGITAL.31" "SD Card.5" | length 1167.9
  Top Layer w10: 3706.42,1536.08 3625.75,1455.41 3625.75,1190.66 3650.95,1165.47 3650.95,605.69 3787.9,468.74
"NetMEGA DIGITAL_32": "MEGA DIGITAL.32" "SD Card.6" | length 1253.5
  Top Layer w10: 3787.9,368.74 3803.48,368.74 3832.42,397.68 3832.42,1258.05 3761.89,1328.58 3761.89,1502.49 3806.42,1547.02
"NetMEGA DIGITAL_33": "MEGA DIGITAL.33" "SD Card.4" | length 938
  Top Layer w10: 3706.42,1436.08 3661.89,1391.55 3661.89,1328.58 3681.47,1309 3681.47,675.17 3787.9,568.74
"NetMEGA DIGITAL_34": "MEGA DIGITAL.34" "SD Card.7" | length 1224.1
  Top Layer w10: 3787.9,268.74 3852.42,333.27 3852.42,1391.55 3806.42,1437.55 3806.42,1447.02
NetPTC1_2: PTC1.2 R34.1 R35.1 | length 2265.3
  Top Layer w10: v1(1246.42,2030) 1997.43,2030 PTC1.2
  Bottom Layer w10: R34.1@455.44,1680 R35.1 ; R35.1@597.91,1677.91 R35.1 ; R35.1@606.08,1680 R35.1 ; v1(1246.42,2030) 950,2030 R35.1
NetPTC2_2: PTC2.2 R36.1 R37.1 | length 1855.8
  Top Layer w10: R37.1@1299.33,1765.12 R36.1
  Bottom Layer w10: R37.1 2055.01,1764.99 2300,1520 2750,1520 PTC2.2
NetQ6_2: "RS PWR.2" Q6.2 | length 1271.5
  Bottom Layer w10: 871.42,2687.02 888.01,2687.02 1050.34,2849.35 1806.2,2849.35 1968.18,3011.34 1968.18,3030.07 Q6.2
NetQ7_2: "RS PWR.3" Q7.2 | length 1706.6
  Bottom Layer w10: 871.42,2587.02 2117.81,2587.02 2430,2899.22 Q7.2
NetR25_1: R25.1 R26.2 SEN1.2 | length 365.5
  Top Layer w10: R25.1 4118.31,1339.54 R26.2 SEN1.2
NetR27_2: R27.2 R28.1 SEN2.2 | length 664.4
  Bottom Layer w10: R27.2 2408.36,467.02 R28.1 2645.12,230.26 SEN2.2
NetR29_1: R29.1 R30.2 SEN3.2 | length 982.6
  Top Layer w10: SEN3.2 3248.23,494.57 R30.2 3248.23,922.87 3309.65,984.28 R29.1
RS232_TX: "MEGA Comm.5" MAX3232.7 | length 3141.6
  Top Layer w10: MAX3232.7 1574.73,1474.62 1701.33,1348.02 v1@2550,1348.02
  Bottom Layer w10: v1(2550,1347.02) 2843.09,1347.02 3106.42,1610.35 3106.42,3047.02
TE2_INT: "MEGA Comm.7" Q6.1 R38.2 | length 1468.8
  Top Layer w10: Q6.1 2273.71,3045.39 2328.08,2991.02 2553.87,2991.02 2713.39,2831.5 R38.2 3121.69,2831.5 3222.56,2932.37 3222.56,2963.16 3306.42,3047.02
TE3_INT: "MEGA Comm.8" Q7.1 R39.2 | length 1172
  Top Layer w10: Q7.1 2717.95,2680 R39.2 3406.42,3034.94
pads on no net: 5.1 5.2 5.3 5.4 5.5 "MEGA Analog In 2.1" "MEGA Analog In 2.2" "MEGA Analog In 2.3" "MEGA Analog In 2.4" "MEGA Analog In 2.5" "MEGA Comm.6" "MEGA DIGITAL.3" "MEGA DIGITAL.4" "MEGA DIGITAL.6" "MEGA DIGITAL.8" "MEGA DIGITAL.10" "MEGA DIGITAL.12" "MEGA DIGITAL.13" "MEGA DIGITAL.14" "MEGA DIGITAL.15" "MEGA DIGITAL.16" "MEGA DIGITAL.17" "MEGA DIGITAL.18" "MEGA DIGITAL.19" "MEGA DIGITAL.20" "MEGA DIGITAL.21" "MEGA DIGITAL.23" "MEGA DIGITAL.27" "MEGA DIGITAL.29" "MEGA Power.1" "MEGA Power.2" "MEGA Power.4" "MEGA Power.8" "MEGA PWM.1" "MEGA PWM.2" "MEGA PWM.5" "MEGA PWM.6" "MEGA PWM.7" "MEGA PWM.8" "MEGA PWM.9" "MEGA PWM.10" "SD Card.2" "SD Card.8" ACC.4 C1.1@868.15,3865 C1.1@1876.3,3865 C1.1@2914.38,3865 C1.2@761.85,3865 C1.2@1770,3865 C1.2@2808.08,3865 C2.1@761.85,3685 C2.1@1770,3685 C2.1@2808.08,3685 C2.2@868.15,3685 C2.2@1876.3,3685 C2.2@2914.38,3685 C3.1@868.15,3775 C3.1@1876.3,3775 C3.1@2914.38,3775 C3.2@761.85,3775 C3.2@1770,3775 C3.2@2808.08,3775 LED. LED.1 LED.2 MAX3232.2 MAX3232.3 MAX3232.4 MAX3232.8 MAX3232.9 MAX3232.10 P9.1 P9.2 T.1 T.2 T.3 U1.1 U1.2 U1.3 U1.4 U1.5 U1.6 U1.7 U1.8
copper on no net: | length 10125.3
  Top Layer w10: 610,3320 565,3365 565,3750 610,3795 ; v1(707.5,3802.5) 766.85,3802.5 ; 710,3320 710,3743.43 667.5,3785.93 667.5,3837.5 610,3895 706.73,3895 725.2,3913.46 819.68,3913.46 868.15,3865 ; 766.85,3710 766.85,3802.5 ; 766.85,3870 766.85,3802.5 ; 868.15,3775 925,3775 1010,3690 1010,3395 ; v1(870,3485) 927.83,3485 938.42,3485 ; 870,3683.15 870,3595 v1(810,3535) 810.31,3534.69 909.69,3534.69 ; 922.83,3590 930,3597.17 v1(930,3660) ; 927.83,3435 970,3435 1010,3395 ; 1010,3320 1010,3395 ; 1618.15,3320 1573.15,3365 1573.15,3750 1618.15,3795 ; v1(1715.65,3802.5) 1775,3802.5 ; 1718.15,3320 1718.15,3743.43 1675.65,3785.93 1675.65,3837.5 1618.15,3895 1714.89,3895 1733.35,3913.46 1827.84,3913.46 1876.3,3865 ; 1775,3710 1775,3802.5 ; 1775,3870 1775,3802.5 ; 1876.3,3775 1933.15,3775 2018.15,3690 2018.15,3395 ; v1(1878.15,3485) 1935.99,3485 1946.57,3485 ; 1878.15,3683.15 1878.15,3595 v1(1818.15,3535) 1818.47,3534.69 1917.84,3534.69 ; 1930.99,3590 1938.15,3597.17 v1(1938.15,3660) ; 1935.99,3435 1978.15,3435 2018.15,3395 ; 2018.15,3320 2018.15,3395 ; 2656.23,3320 2611.23,3365 2611.23,3750 2656.23,3795 ; v1(2753.73,3802.5) 2813.08,3802.5 ; 2756.23,3320 2756.23,3743.43 2713.73,3785.93 2713.73,3837.5 2656.23,3895 2752.96,3895 2771.42,3913.46 2865.91,3913.46 2914.38,3865 ; 2813.08,3710 2813.08,3802.5 ; 2813.08,3870 2813.08,3802.5 ; 2914.38,3775 2971.23,3775 3056.23,3690 3056.23,3395 ; v1(2916.23,3485) 2974.06,3485 2984.64,3485 ; 2916.23,3683.15 2916.23,3595 v1(2856.23,3535) 2856.54,3534.69 2955.92,3534.69 ; 2969.06,3590 2976.23,3597.17 v1(2976.23,3660) ; 2974.06,3435 3016.23,3435 3056.23,3395 ; 3056.23,3320 3056.23,3395 ; 3501.61,3345 3501.61,3414.88 3531.73,3445 3631.73,3445 3731.73,3545 ; 3611.85,3345 3611.85,3375.12 3731.73,3495 3781.73,3495 3831.73,3545 3831.73,3570 ; 4126.48,3345 4126.48,3414.88 4156.6,3445 4256.6,3445 4356.6,3545 ; 4236.72,3345 4236.72,3375.12 4356.6,3495 4406.6,3495 4456.6,3545 4456.6,3570
  Bottom Layer w10: 810,3320 v1(810,3535) ; 1818.15,3320 v1(1818.15,3535) ; 2856.23,3320 v1(2856.23,3535)

## Polygon pours and split planes (outlines as drawn)
no net on Top Layer "Top Layer-5V" (solid, pour order 23): 2591.23,3260 2591.23,3950 3111.23,3950 3111.23,3265 3106.23,3260
no net on Top Layer "3.3Voverlay" (solid, remove dead copper, pour order 26): 2591.23,3260 3111.23,3260 3111.23,3950 2591.23,3950 2591.23,3260
no net on Top Layer "Top Layer-5V" (solid, pour order 24): 1553.15,3260 1553.15,3950 2073.15,3950 2073.15,3265 2068.15,3260
no net on Top Layer "3.3Voverlay" (solid, remove dead copper, pour order 27): 1553.15,3260 2073.15,3260 2073.15,3950 1553.15,3950 1553.15,3260
no net on Top Layer "Top Layer-5V" (solid, pour order 25): 545,3260 545,3950 1065,3950 1065,3265 1060,3260
no net on Top Layer "3.3Voverlay" (solid, remove dead copper, pour order 28): 545,3260 1065,3260 1065,3950 545,3950 545,3260
GND on Top Layer "Top Layer-GND" (solid, pour order 30): 384.36,3204.99 393.09,3196.2 4799.4,3196.2 4799.4,10.26 4795.04,5.87 380,5.87
no net on Bottom Layer "Bottom Layer-GND" (solid, pour order 20): 2591.23,3260 2591.23,3950 3106.23,3950 3111.23,3945 3111.23,3260
no net on Bottom Layer "Bottom Layer-GND" (solid, pour order 21): 1553.15,3260 1553.15,3950 2068.15,3950 2073.15,3945 2073.15,3260
no net on Bottom Layer "Bottom Layer-GND" (solid, pour order 22): 545,3260 545,3950 1060,3950 1065,3945 1065,3260
5V on Bottom Layer "Bottom Layer-5V" (solid, pour order 29): 377.94,3206.59 4790.68,3206.59 4802.6,3194.67 4798.63,3190.7 4798.63,20 373.97,20 370,23.97

## Keep-outs
Keep-Out Layer:
  lines w10: 3433.9,3245 3433.9,3695 3933.9,3695 3933.9,3245 3433.9,3245 ; 4058.76,3245 4058.76,3695 4558.76,3695 4558.76,3245 4058.76,3245
  lines w30: 350,5 350,3200 ; 0,0 4800,0 4800,3200 0,3200 0,0

## Silkscreen, mask and mechanical layers (free items; w line width, h text height)
Top Overlay:
  lines w3: 1011.42,2157.02 1011.42,2277.02 ; 1011.42,2387.02 1011.42,2517.02
  lines w5: 532.74,1398.09 532.74,1598.09 632.74,1598.09 632.74,1658.09 1132.74,1658.09 1132.74,1598.09 1232.74,1598.09 1232.74,1398.09 532.74,1398.09 ; 711.42,2187.02 711.42,2787.02 771.42,2787.02 771.42,2887.02 971.42,2887.02 971.42,2087.02 771.42,2087.02 771.42,2187.02 711.42,2187.02 ; 940.49,765.64 1240.49,765.64 1240.49,965.64 1140.49,965.64 1140.49,1025.64 1040.49,1025.64 1040.49,965.64 940.49,965.64 940.49,765.64 ; 1028.86,139.22 1028.86,339.22 1128.86,339.22 1128.86,399.22 1228.86,399.22 1228.86,339.22 1328.86,339.22 1328.86,139.22 1028.86,139.22 ; 1454.92,140.34 1454.92,340.34 1554.92,340.34 1554.92,400.34 1654.92,400.34 1654.92,340.34 1754.92,340.34 1754.92,140.34 1454.92,140.34 ; 2584.01,30.26 2584.01,530.26 2584.01,630.26 2784.01,630.26 2784.01,530.26 2844.01,530.26 2844.01,430.26 2844.01,130.26 2784.01,130.26 2784.01,30.26 2584.01,30.26 ; 2786.33,758.37 3186.33,758.37 3186.33,958.37 3086.33,958.37 3086.33,1018.37 2886.33,1018.37 2886.33,958.37 2786.33,958.37 2786.33,758.37 ; 2885.79,32.12 2885.79,532.12 2885.79,632.12 3085.79,632.12 3085.79,532.12 3145.79,532.12 3145.79,432.12 3145.79,132.12 3085.79,132.12 3085.79,32.12 2885.79,32.12 ; 3218.38,108.77 3218.38,308.77 3618.38,308.77 3618.38,108.77 3518.38,108.77 3518.38,48.77 3318.38,48.77 3318.38,108.77 3218.38,108.77
  lines w10: 345,3220 1275,3220 1275,3955 345,3955 345,3220 ; 1353.15,3220 2283.15,3220 2283.15,3955 1353.15,3955 1353.15,3220 ; 2391.23,3220 3321.23,3220 3321.23,3955 2391.23,3955 2391.23,3220 ; 3408.9,3220 3408.9,3720 3958.9,3720 3958.9,3220 3408.9,3220 ; 4033.76,3220 4033.76,3720 4583.76,3720 4583.76,3220 4033.76,3220
  text "8" at 705,3885 h30 r90
  text "8" at 1713.15,3885 h30 r90
  text "8" at 2751.23,3885 h30 r90
  text "6" at 705,3685 h30 r90
  text "6" at 1713.15,3685 h30 r90
  text "6" at 2751.23,3685 h30 r90
  text "GND" at 3756.73,3665 h25 r180
  text "3.3" at 3866.73,3665 h25 r180
  text "GND" at 4381.6,3665 h25 r180
  text "3.3" at 4491.6,3665 h25 r180
  text "1" at 1030,3240 h30 r90
  text "1" at 2038.15,3240 h30 r90
  text "1" at 3076.23,3240 h30 r90
  text "4" at 725,3235 h30 r90
  text "3" at 825,3235 h30 r90
  text "2" at 925,3235 h30 r90
  text "4" at 1733.15,3235 h30 r90
  text "3" at 1833.15,3235 h30 r90
  text "2" at 1933.15,3235 h30 r90
  text "4" at 2771.23,3235 h30 r90
  text "3" at 2871.23,3235 h30 r90
  text "2" at 2971.23,3235 h30 r90
  text "AREF" at 896.42,3107.02 h30
  text "14" at 2686.42,3107.02 h30
  text "21" at 3386.42,3107.02 h30
  text "22" at 3596.42,2932.02 h30
  text "23" at 3866.42,2932.02 h30
  text "28V" at 996.42,2827.02 h30 r270
  text "TE2" at 996.42,2722.02 h30 r270
  text "TE3" at 996.42,2627.02 h30 r270
  text "GND" at 996.42,2372.02 h30 r270
  text "12V" at 1390,2270 h20
  text "52" at 3596.42,1432.02 h30
  text "53" at 3866.42,1432.02 h30
  text "GND" at 3426.24,1385.66 h20
  text "RS232" at 1063.74,1356.97 h30
  text "5V" at 4201.81,1350.58 h30 r270
  text "3.3V" at 2770,1290 h20
  text "5V" at 1481.42,1057.02 h30
  text "GND" at 1616.42,1057.02 h30
  text "A0" at 1981.42,1057.02 h30
  text "A7" at 2686.42,1057.02 h30
  text "A8" at 2881.42,1057.02 h30
  text "A15" at 3571.42,1057.02 h30
  text "5V" at 3672.9,893.74 h30 r270
  text "5V" at 1290.13,836.19 h30 r90
  text "5V" at 3241.33,833.37 h30 r90
  text "ROCKETSAT-11" at 4069.97,788.09 h50
  text "5V" at 3551.92,780 h20
  text "REX-B" at 4245.75,682.62 h50
  text "Main Board Rev 1" at 3968.9,590.34 h50
  text "A. Caballero" at 4034.82,502.45 h25
  text "N. Ferguson" at 4430.32,502.45 h25
  text "S. Kirkley" at 4425.92,436.53 h25
  text "L. Hutchinson" at 4034.82,432.14 h25
  text "V. Nystrom" at 4030.42,357.43 h25
  text "5V" at 3176.4,231.58 h30 r270
  text "5V" at 1800,210 h30 r90
  text "5V" at 1370,208.77 h30 r90
  text "5V" at 854.27,123.11 h30 r90
  text "5V" at 3110.79,77.12 h30
  text "5V" at 2809.01,75.26 h30
Bottom Overlay:
  text "8 - 3.3V" at 655,3670 h30 r180
  text "8 - 3.3V" at 1663.15,3670 h30 r180
  text "8 - 3.3V" at 2701.23,3670 h30 r180
  text "6 - GND" at 565,3625 h30 r180
  text "6 - GND" at 1573.15,3625 h30 r180
  text "6 - GND" at 2611.23,3625 h30 r180
  text "5 - T OUT" at 565,3580 h30 r180
  text "5 - T OUT" at 1573.15,3580 h30 r180
  text "5 - T OUT" at 2611.23,3580 h30 r180
  text "4 - 3.3V IN" at 565,3535 h30 r180
  text "4 - 3.3V IN" at 1573.15,3535 h30 r180
  text "4 - 3.3V IN" at 2611.23,3535 h30 r180
  text "3 - P OUT" at 565,3490 h30 r180
  text "3 - P OUT" at 1573.15,3490 h30 r180
  text "3 - P OUT" at 2611.23,3490 h30 r180
  text "2 - GND" at 565,3445 h30 r180
  text "2 - GND" at 1573.15,3445 h30 r180
  text "2 - GND" at 2611.23,3445 h30 r180
  text "1 - 5V In" at 565,3400 h30 r180
  text "1 - 5V In" at 1573.15,3400 h30 r180
  text "1 - 5V In" at 2611.23,3400 h30 r180
Mechanical 13:
  lines w10: 6.42,1047.02 631.42,1047.02 4006.42,1047.02 4006.42,3147.02 6.42,3147.02 ; 71.68,4155.99 71.68,4175.99 ; 131.68,4145.99 71.68,4165.99 ; 131.68,4185.99 71.68,4165.99 ; 2210,4165.99 71.68,4165.99 ; 2931.78,4165.99 5070.09,4165.99 ; 4973.03,2002.39 4238.03,2002.39 4238.03,1072.39 4978.03,1072.39 4978.03,2002.39 ; 5010.09,4145.99 5070.09,4165.99 ; 5010.09,4185.99 5070.09,4165.99 ; 5070.09,4155.99 5070.09,4175.99 ; 5477.36,57.41 5497.36,-2.59 ; 5477.36,3230.99 5497.36,3290.99 ; 5487.36,-2.59 5507.36,-2.59 ; 5487.36,3290.99 5507.36,3290.99 ; 5497.36,1248.32 5497.36,-2.59 ; 5497.36,2040.07 5497.36,3290.99 ; 5517.36,57.41 5497.36,-2.59 ; 5517.36,3230.99 5497.36,3290.99 ; 49.27,78.11 799.27,78.11 799.27,828.11 49.27,828.11 49.27,78.11 ; 3727.9,18.74 4982.9,18.74 4982.9,1018.74 3727.9,1018.74 3727.9,18.74
  text "4998.41 (mil)" at 2220,4130 h60
  text "YELLOW LINE MARKS BOARD SHAPE, RED LINE MARKS ARDUINO SHAPE, ARDUNIO PINOUTS ARE POSITIONED CORRECTLY" at 0,3990 h60
  text "UNUSABLE SPACE ON ARDUINO" at 131.42,1372.02 h60 r90
  text "3293.582 (mil)" at 5533.35,1258.32 h60 r90

## Dimensions
746.42,3047.02 to 0,0 on Mechanical 1
2906.42,1147.02 to 350,5 on Mechanical 1

## Text inside footprints (layer, text, board x,y; h text height)
ILED1: Top Overlay "+     --" at 4245,3050 h60
ILED2: Top Overlay "+     --" at 4535,3050 h60
ILED3: Top Overlay "+     --" at 4535,2750 h60
ILED4: Top Overlay "+     --" at 4535,2451.79 h60
ILED5: Top Overlay "+     --" at 4535,2158.39 h60
"MEGA DIGITAL": Top Overlay "5V" at 3731.42,3112.02 h30; Top Overlay "GND" at 3716.42,1252.02 h30
Q1: Top Overlay "3" at 2961.13,2313.75 h30 r270; Top Overlay "1" at 2861.91,2302.47 h30 r270
Q2: Top Overlay "3" at 3310.93,2654.65 h30; Top Overlay "1" at 3308.68,2753.87 h30
Q4: Top Overlay "3" at 2961.13,2110.79 h30 r270; Top Overlay "1" at 2852.89,2099.52 h30 r270
Q5: Top Overlay "3" at 3405.37,1929.89 h30 r270; Top Overlay "1" at 3301.64,1923.13 h30 r270
Q6: Top Overlay "3" at 1949.89,2954.94 h30 r90; Top Overlay "1" at 2055.21,2962.21 h30 r90
Q7: Top Overlay "3" at 2400.55,2829.34 h30 r90; Top Overlay "1" at 2499.12,2840.12 h30 r90